# EAGLE board schema (EAGLE 7.7.0)
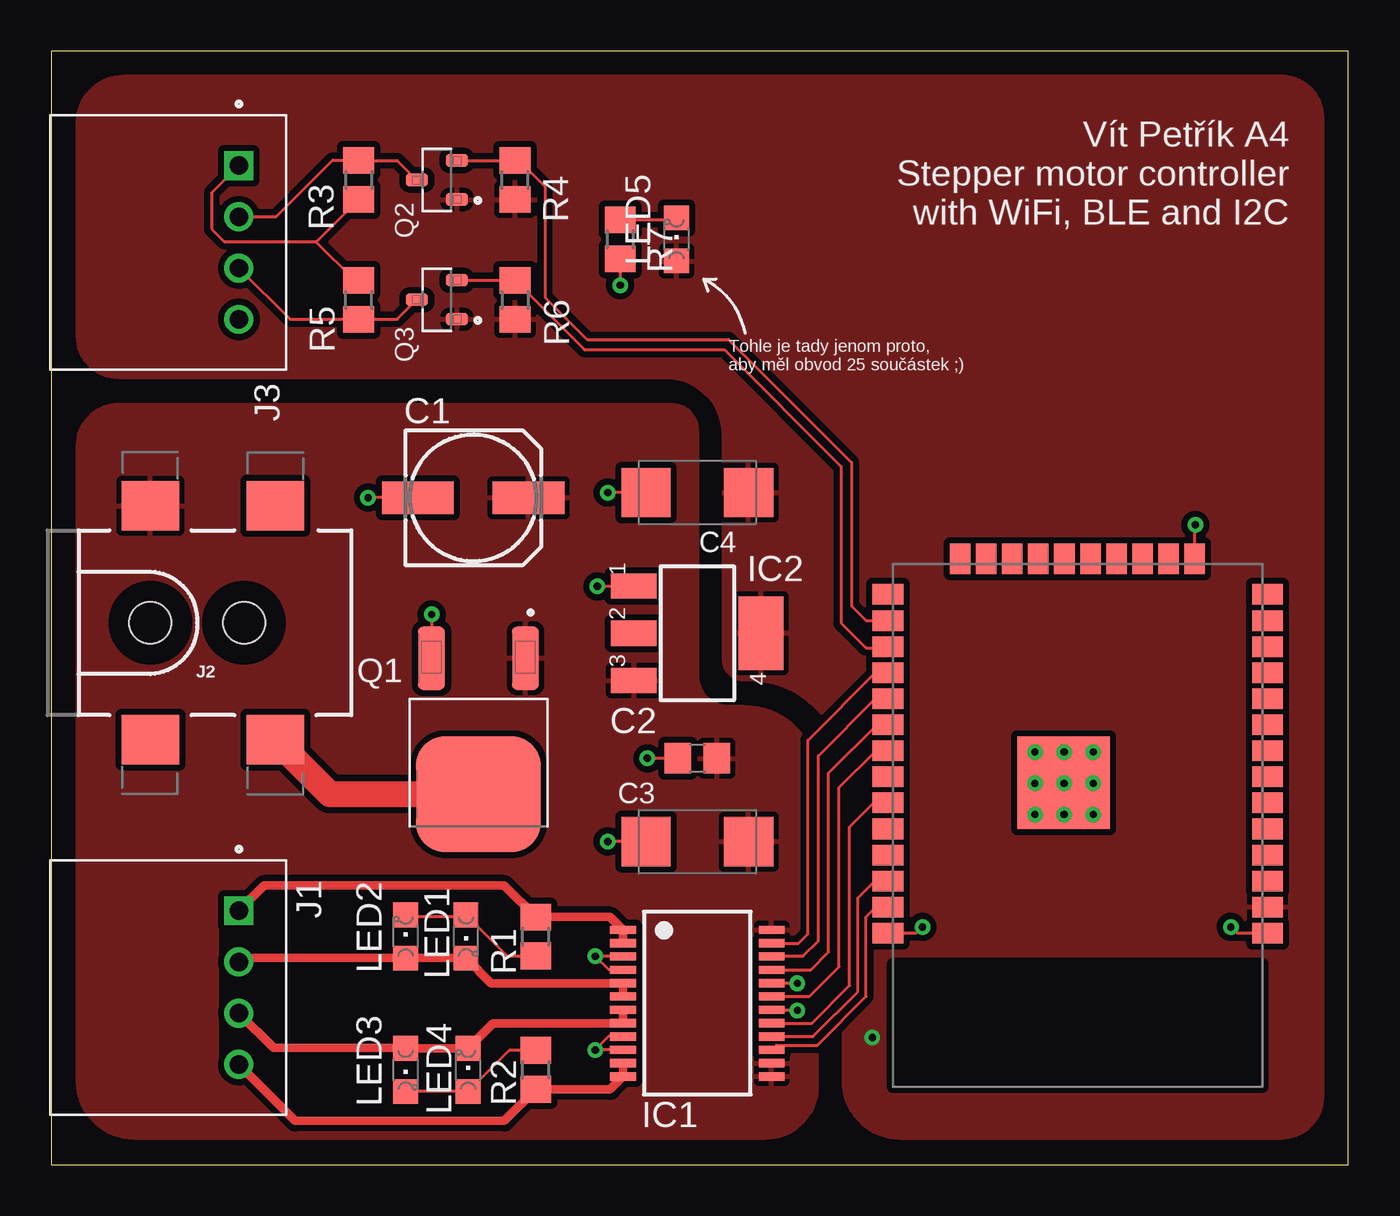
[diagram p0: board, top side]
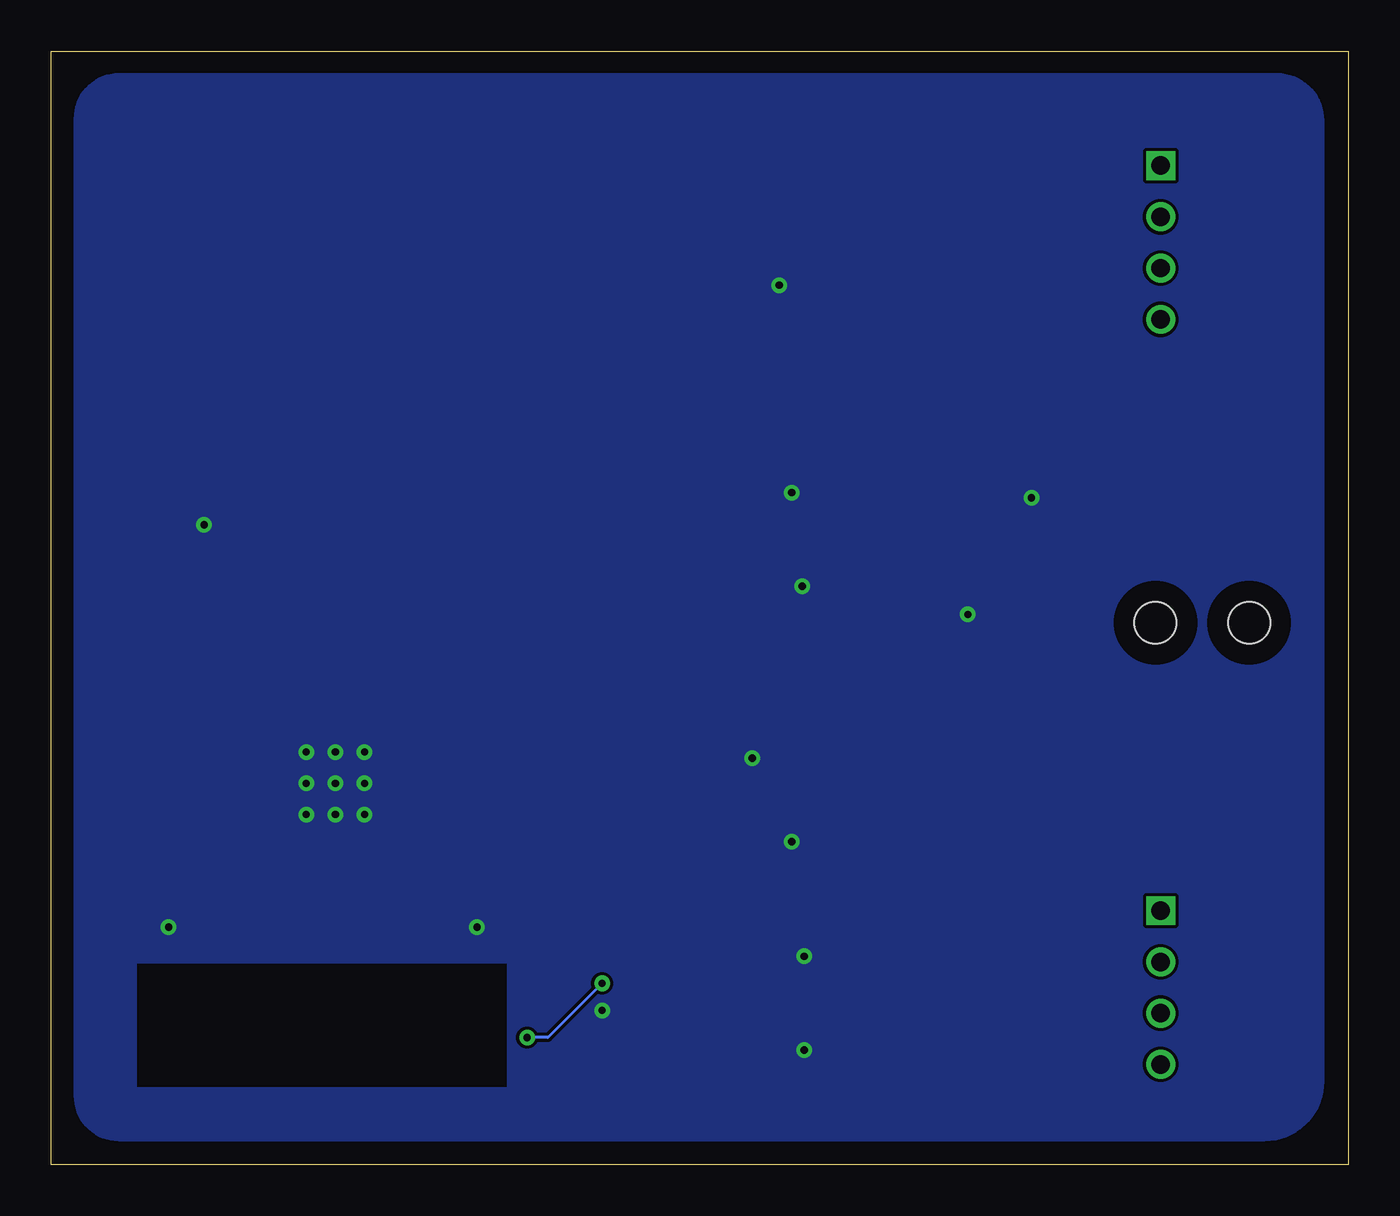
[diagram p1: board, bottom side, seen from below]

Size 63.23 x 54.28 mm. Coordinates in mm from the lower left corner, seen from the top.
Outline: 0,0 63.23,0 63.23,54.28 0,54.28 0,0
Copper layers (1*16): Top 0.035mm / dielectric 1.5mm / Bottom 0.035mm
Design rules "default": minimum track width 6mil, minimum drill 0.35mm, track to track 6mil, track to pad 6mil, pad to pad 6mil, via to via 6mil, smd to smd 6mil, copper to edge 40mil, drill to drill 6mil, minimum pad ring 10mil, minimum via ring 8mil, stop-mask expansion 4mil, vias tented up to drill 0mil, thermal gap 10mil

## Footprints (pad centres in the part's own frame; a part is rotated, then mirrored left to right if it is on the bottom)
153CLV-0605 = smd 3.5 x 1.6: + 2.7,0; - -2.7,0
C0805 = smd 1.3 x 1.5: 1 -0.95,0; 2 0.95,0
SMC_C = smd 2.4 x 2.4: + -2.5,0; - 2.5,0
SSOP24 = smd 0.4 x 1.25: 1 -3.575,-3.625; 2 -2.925,-3.625; 3 -2.275,-3.625; 4 -1.625,-3.625; 5 -0.975,-3.625; 6 -0.325,-3.625; 7 0.325,-3.625; 8 0.975,-3.625; 9 1.625,-3.625; 10 2.275,-3.625; 11 2.925,-3.625; 12 3.575,-3.625; 13 3.575,3.625; 14 2.925,3.625; 15 2.275,3.625; 16 1.625,3.625; 17 0.975,3.625; 18 0.325,3.625; 19 -0.325,3.625; 20 -0.975,3.625; 21 -1.625,3.625; 22 -2.275,3.625; 23 -2.925,3.625; 24 -3.575,3.625
SOT223 = smd 1.219 x 2.235: 1 -2.311,-3.099; 2 0,-3.099; 3 2.311,-3.099 | smd 3.6 x 2.2: 4 0,3.099
HDR-04/RA = drill 0.9 square: 1 -3.75,0 | drill 0.9: 2 -1.25,0; 3 1.25,0; 4 3.75,0
POWER_JACK_SMD_OVERPASTE_TOE = smd 2.8 x 2.4: GND 0,-5.7; P$4 6.1,-5.7; VIN0 0,5.7; VIN1 6.1,5.7 | hole 2.032: 0,0; 4.572,0
CHIPLED_0805 = smd 1.2 x 1.2: A 0,-1.05; C 0,1.05
DPAK3 = smd 1.31 x 3.08: 1 -2.29,-4.12; 2 2.29,-4.12 | smd 6.09 x 5.63: 3 0,2.51
SOT23-3 = smd 0.62 x 1.1: 1 -0.95,-0.975; 2 0.95,-0.975; 3 0,0.975
R0805 = smd 1.3 x 1.5: 1 -0.95,0; 2 0.95,0
ESP-32S = smd 1.5 x 1: 1 -9.25,7; 2 -9.25,5.73; 3 -9.25,4.46; 4 -9.25,3.19; 5 -9.25,1.92; 6 -9.25,0.65; 7 -9.25,-0.62; 8 -9.25,-1.89; 9 -9.25,-3.16; 10 -9.25,-4.43; 11 -9.25,-5.7; 12 -9.25,-6.97; 13 -9.25,-8.24; 14 -9.25,-9.51; 25 9.25,-9.51; 26 9.25,-8.24; 27 9.25,-6.97; 28 9.25,-5.7; 29 9.25,-4.43; 30 9.25,-3.16; 31 9.25,-1.89; 32 9.25,-0.62; 33 9.25,0.65; 34 9.25,1.92; 35 9.25,3.19; 36 9.25,4.46; 37 9.25,5.73; 38 9.25,7 | smd 1 x 1.5: 15 -5.7,-11.25; 16 -4.43,-11.25; 17 -3.16,-11.25; 18 -1.89,-11.25; 19 -0.62,-11.25; 20 0.65,-11.25; 21 1.92,-11.25; 22 3.19,-11.25; 23 4.46,-11.25; 24 5.73,-11.25 | smd 4.5 x 4.5: GND 0.68,-0.33

## Placement (x,y rotation side)
C1  10uF  [153CLV-0605]  20.57,32.51 0 top
C2  0.1uf  [C0805]  31.5,19.81 180 top
C3  10uF  [SMC_C]  31.5,15.75 180 top
C4  10uF  [SMC_C]  31.5,32.77 180 top
IC1  TB6612FNG  [SSOP24]  31.5,7.87 270 top
IC2  317EMP  [SOT223]  31.5,25.91 270 top
J1  S4B-XH-A(LF)(SN)  [HDR-04/RA]  9.14,8.64 270 top
J2  POWER_JACKTOE  [POWER_JACK_SMD_OVERPASTE_TOE]  4.83,26.42 0 top
J3  S4B-XH-A(LF)(SN)  [HDR-04/RA]  9.14,44.96 270 top
LED1  RED  [CHIPLED_0805]  20.22,11.13 180 top
LED2  GREEN  [CHIPLED_0805]  17.27,11.13 0 top
LED3  RED  [CHIPLED_0805]  20.32,4.62 0 top
LED4  GREEN  [CHIPLED_0805]  17.27,4.62 180 top
LED5  RED  [CHIPLED_0805]  30.48,45.11 0 top
Q1  FQD13N06LTM  [DPAK3]  20.83,20.57 180 top
Q2  2N7002,215  [SOT23-3]  18.8,48.01 90 top
Q3  2N7002,215  [SOT23-3]  18.8,42.16 90 top
R1  1k  [R0805]  23.62,11.13 90 top
R2  1k  [R0805]  23.62,4.62 90 top
R3  10k  [R0805]  14.99,48.01 270 top
R4  10k  [R0805]  22.61,48.01 90 top
R5  10k  [R0805]  14.99,42.16 90 top
R6  10k  [R0805]  22.61,42.16 270 top
R7  220R  [R0805]  27.74,45.11 270 top
U2  ESP-32S  [ESP-32S]  50.04,18.29 180 top

## Library data of the parts
C1-C4 = rcl; SPICEPREFIX: C
IC1 = adafruit
IC2 = linear
J1 J3 = Connectors; CREATED_BY: PCBLayout.com; DIGIKEY_PART_NUMBER: 455-2243-ND; MANUFACTURER: JST Sales America Inc.; MPN: S4B-XH-A(LF)(SN)
J2 = SparkFun-Connectors; PROD_ID: CONN-08106; SF_ID: PRT-12748
LED1-LED5 = led
Q1 = Transistor; CREATED_BY: PCBLayout.com; DIGIKEY_PART_NUMBER: FQD13N06LTMCT-ND; MANUFACTURER: ON Semiconductor; MPN: FQD13N06LTM; PACKAGE: DPAK-4
Q2 Q3 = Transistor; CREATED_BY: PCBLayout.com; DIGIKEY_PART_NUMBER: 1727-2764-1-ND; MANUFACTURER: Nexperia USA Inc.; MPN: 2N7002,215; PACKAGE: SOT-23-3
R1-R7 = rcl; SPICEPREFIX: R
U2 = esp32

## Nets
+3V3: C4.+ IC1.20 IC2.4 LED5.A Q2.1 Q3.1 R4.1 R6.2 U2.2
AIN1: IC1.21 U2.30
AIN2: IC1.22 U2.29
BIN1: IC1.17 U2.33
BIN2: IC1.16 U2.36
GND: C1.- C2.2 C3.- C4.- IC1.3 IC1.4 IC1.9 IC1.10 IC1.18 IC2.1 Q1.2 R7.2 U2.1 U2.15 U2.38 U2.GND
I2CV+: J3.1 R3.2 R5.2
N$1: IC1.1 IC1.2 J1.1 R1.2
N$2: IC1.5 IC1.6 J1.2 LED1.C LED2.A
N$3: IC1.7 IC1.8 J1.3 LED3.C LED4.A
N$4: IC1.11 IC1.12 J1.4 R2.1
N$5: LED1.A LED2.C R1.1
N$6: LED3.A LED4.C R2.2
N$7: LED5.C R7.1
PWMA: IC1.23 U2.28
PWMB: IC1.15 U2.37
SCL: Q3.2 R6.1 U2.27
SCLIN: J3.3 Q3.3 R5.1
SDA: Q2.2 R4.2 U2.26
SDAIN: J3.2 Q2.3 R3.1
STBY: IC1.19 U2.31
V+: C1.+ C2.1 C3.+ IC1.13 IC1.14 IC1.24 IC2.3 J2.VIN0 Q1.1
V-: J2.P$4 Q1.3

## Tracks (layer width: path | path; a pad name or v marks a point on that pad's centre or on a via)
+3V3  (via drill 0.35)
  Top 0.152: v36.37,8.84 IC1.20
  Bottom 0.152: v36.37,8.84 39.01,6.2 v40.03,6.2
  pour Top (isolate 0.305): 1.27,40.39 1.27,50.8 arc-90 3.56,53.09 59.94,53.09 arc-90 61.98,51.05 61.98,3.3 arc-90 59.94,1.27 41.4,1.27 arc-90 38.61,4.06 38.61,19.05 arc90 34.04,23.62 33.78,23.62 arc-90 32.77,24.64 32.77,35.56 arc90 29.97,38.35 3.3,38.35 arc-90
+V
  cutout Top: 8.23,13 8.23,4.78 8.43,4.57 27.03,4.57 27.64,5.18 27.64,10.36 25.91,12.09 22.66,12.09 21.34,13.41 10.06,13.41 9.65,13
AIN1
  Top 0.152: IC1.21 37.03,9.5 37.9,10.36 37.9,19.1 40.24,21.45 U2.30
AIN2
  Top 0.152: IC1.22 35.14,10.17 36.65,10.17 37.39,10.9 37.39,19.93 40.18,22.72 U2.29
BIN1
  Top 0.152: IC1.17 37.07,6.9 38.91,8.74 38.91,16.46 40.09,17.64 U2.33
BIN2
  Top 0.152: IC1.16 37.13,6.25 39.32,8.43 39.32,13.01 40.14,13.83 U2.36
GND  (via drill 0.35)
  Top 0.152: v36.37,7.52 35.15,7.52 IC1.18 | v42.47,11.58 42.17,11.29 U2.38 | v57.51,11.58 57.81,11.28 59.28,11.28 U2.1 | U2.15 55.74,31.15 v55.78,31.19 | C3.- v27.13,15.75 | IC1.4 27.18,9.5 v26.52,10.16 IC1.3 | 27.99,6.25 IC1.9 27.16,6.25 26.52,5.61 v26.52,5.59 27.86,5.59 IC1.10 | C2.2 v29.06,19.81 | IC2.1 28.37,28.19 v26.62,28.19 | C4.- v27.13,32.77 | C1.- v15.44,32.51 | Q1.2 v18.54,26.82 | R7.2 v27.74,42.88 | U2.GND v49.38,18.59
  other vias: 49.38,17.07 47.96,17.07 50.8,17.07 50.8,18.59 47.96,18.59 50.8,20.12 49.38,20.12 47.96,20.12
  pour Bottom: 3.56,53.14 59.94,53.14 arc-90 62.08,51 62.08,3.35 arc-90 59.94,1.22 59.84,1.22 4.06,1.22 arc-90 1.22,4.06 1.22,50.9 arc-90 3.45,53.14
I2CV+
  Top 0.152: J3.1 7.82,47.39 7.82,45.62 8.43,45.01 12.89,45.01 | R3.2 12.94,45.01 12.89,45.01 | R5.2 14.78,43.11 12.89,45.01
N$1
  Top 0.406: IC1.2 IC1.1 27.25,12.07 R1.2 22.08,13.61 10.37,13.61 J1.1
N$2
  Top 0.406: 9.33,10.07 LED2.A LED1.C 21.45,8.85 IC1.5 IC1.6
  Top 0.61: 9.33,10.07 J1.2
N$3
  Top 0.406: IC1.7 IC1.8 21.55,6.9 LED3.C LED4.A | 17.25,5.69 10.84,5.69 J1.3
  Top 0.61: LED4.A 17.25,5.69
N$4
  Top 0.406: IC1.11 IC1.12 27.25,3.67 R2.1 22.08,2.13 11.9,2.13 J1.4
N$5
  Top 0.152: LED2.C 17.37,12.07 20.12,12.07 LED1.A 22.22,10.18 R1.1
N$6
  Top 0.152: R2.2 22.32,5.57 LED3.A LED4.C
N$7
  Top 0.152: R7.1 30.38,46.06 LED5.C
PWMA
  Top 0.152: IC1.23 36.43,10.8 36.88,11.25 36.88,20.69 40.18,23.99 U2.28
PWMB
  Top 0.152: IC1.15 35.34,5.82 37.34,5.82 39.73,8.21 39.73,12.09 40.19,12.56 U2.37
SCL
  Top 0.152: Q3.2 R6.1 25.99,39.73 32.82,39.73 38.51,34.04 38.51,26.42 39.73,25.2 40.73,25.2 U2.27
SCLIN
  Top 0.152: J3.3 11.64,41.21 R5.1 16.87,41.21 Q3.3
SDA
  Top 0.152: Q2.2 R4.2 22.81,48.96 24.08,47.69 24.08,42.27 26.11,40.23 33.02,40.23 39.01,34.24 39.01,27.23 39.73,26.52 40.78,26.52 U2.26
SDAIN
  Top 0.152: J3.2 10.95,46.21 13.72,48.97 14.97,48.97 R3.1 16.87,48.96 Q2.3
STBY
  Top 0.152: IC1.19 36.95,8.2 38.41,9.65 38.41,18.39 40.19,20.18 U2.31
V+
  pour Top (isolate 0.305): 30.23,37.08 arc-90 31.5,35.81 31.5,23.88 arc90 33.02,22.35 33.78,22.35 arc-90 37.34,18.8 37.34,3.81 arc-90 34.8,1.27 4.06,1.27 arc-90 1.27,4.06 1.27,35.05 arc-90 3.3,37.08
V-
  Top 1.27: J2.P$4 13.58,18.06 Q1.3

## Text on the board
tSilk: Vít Petřík A4 / Stepper motor controller / with WiFi, BLE and I2C | Tohle je tady jenom proto, / aby měl obvod 25 součástek ;)